# Altium PCB PCB1.PcbDoc (part 1 of 2)
Units mm, origin at the board's own origin, x right, y up, seen from the top; angles counter-clockwise.
Board outline 100.25 x 87.25 mm, 2 copper layers (Top Layer, Bottom Layer); 105 components, 70 nets, 373 pads, 474 vias.
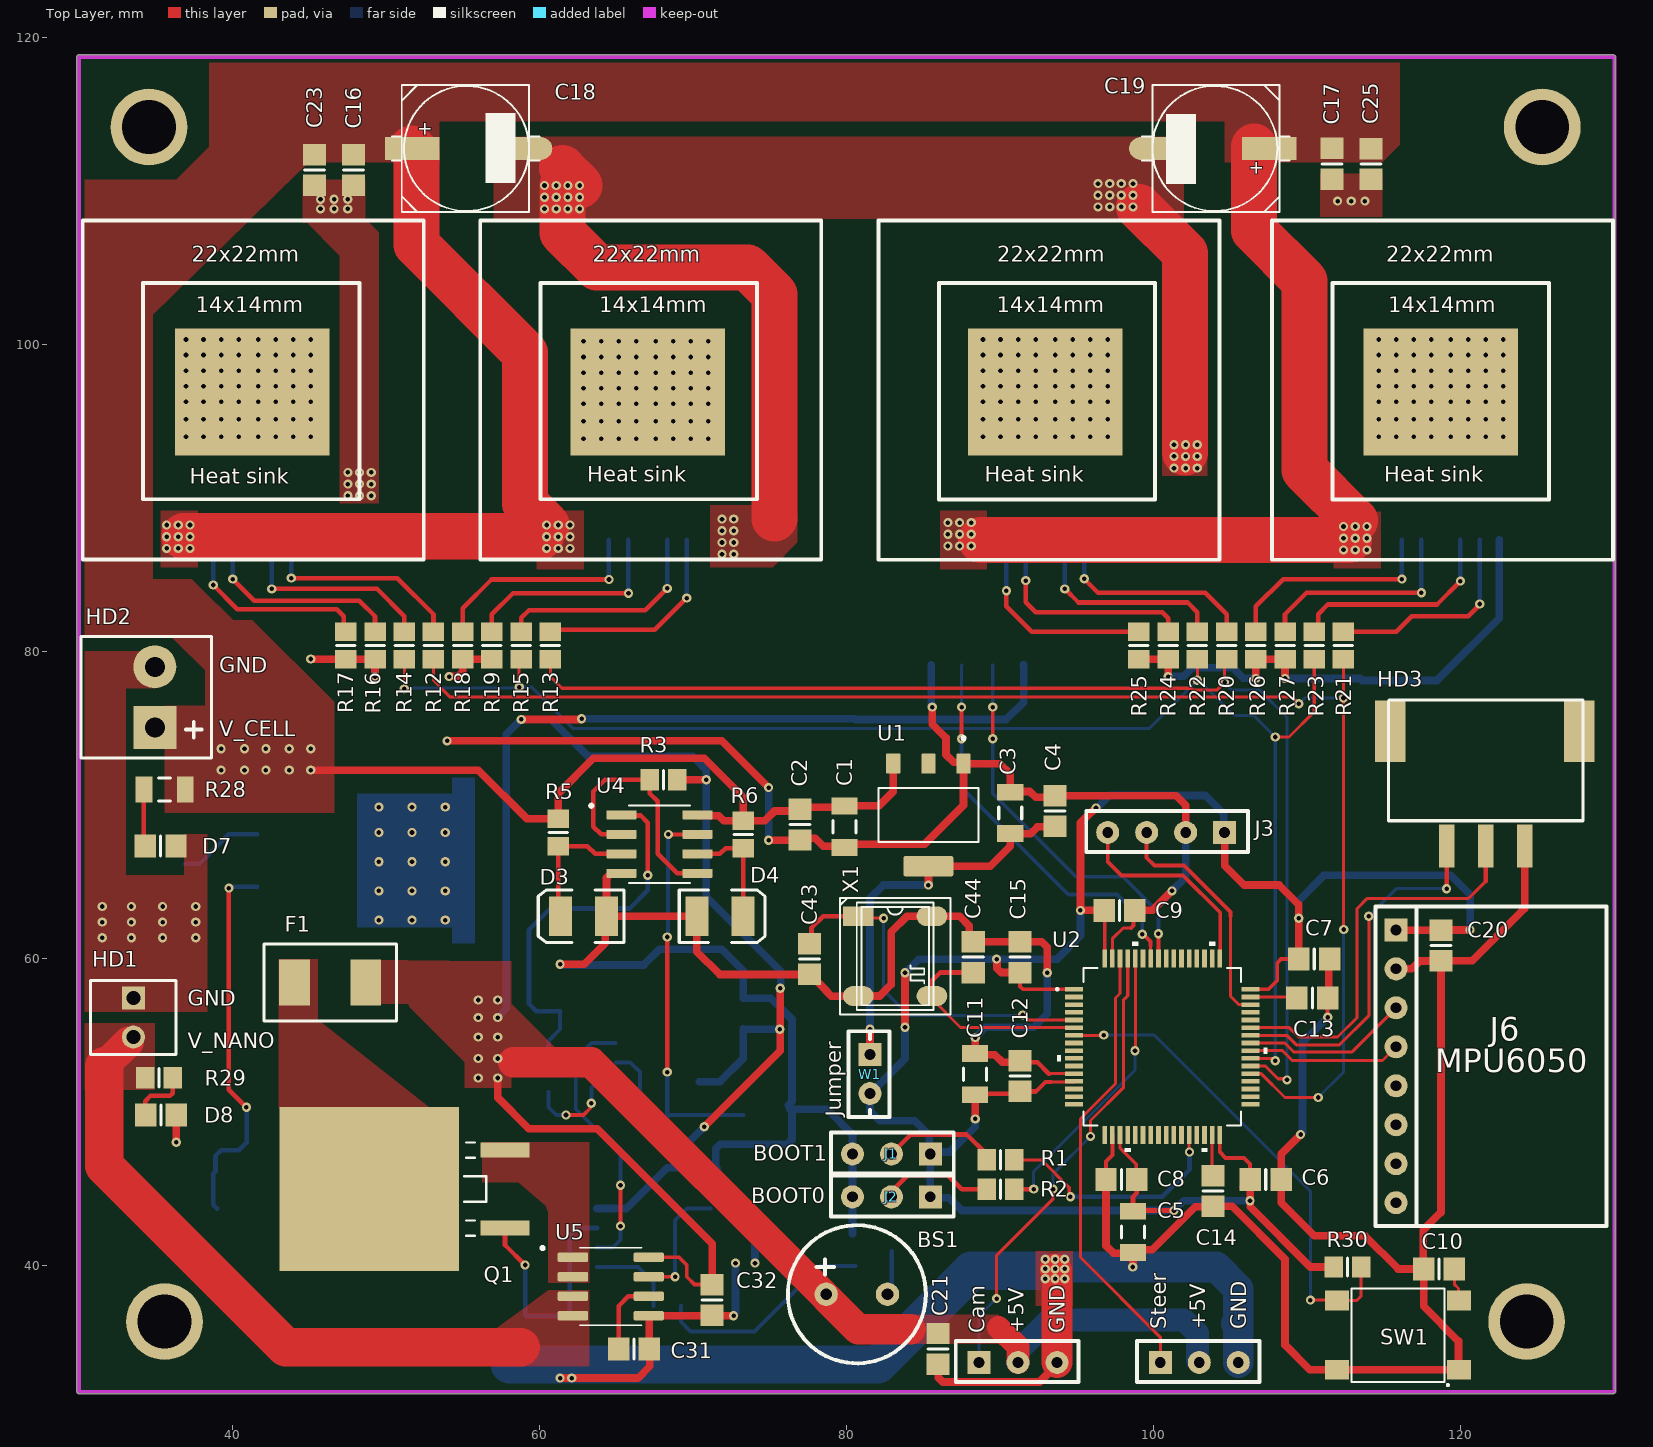
[diagram p0: Top Layer view]
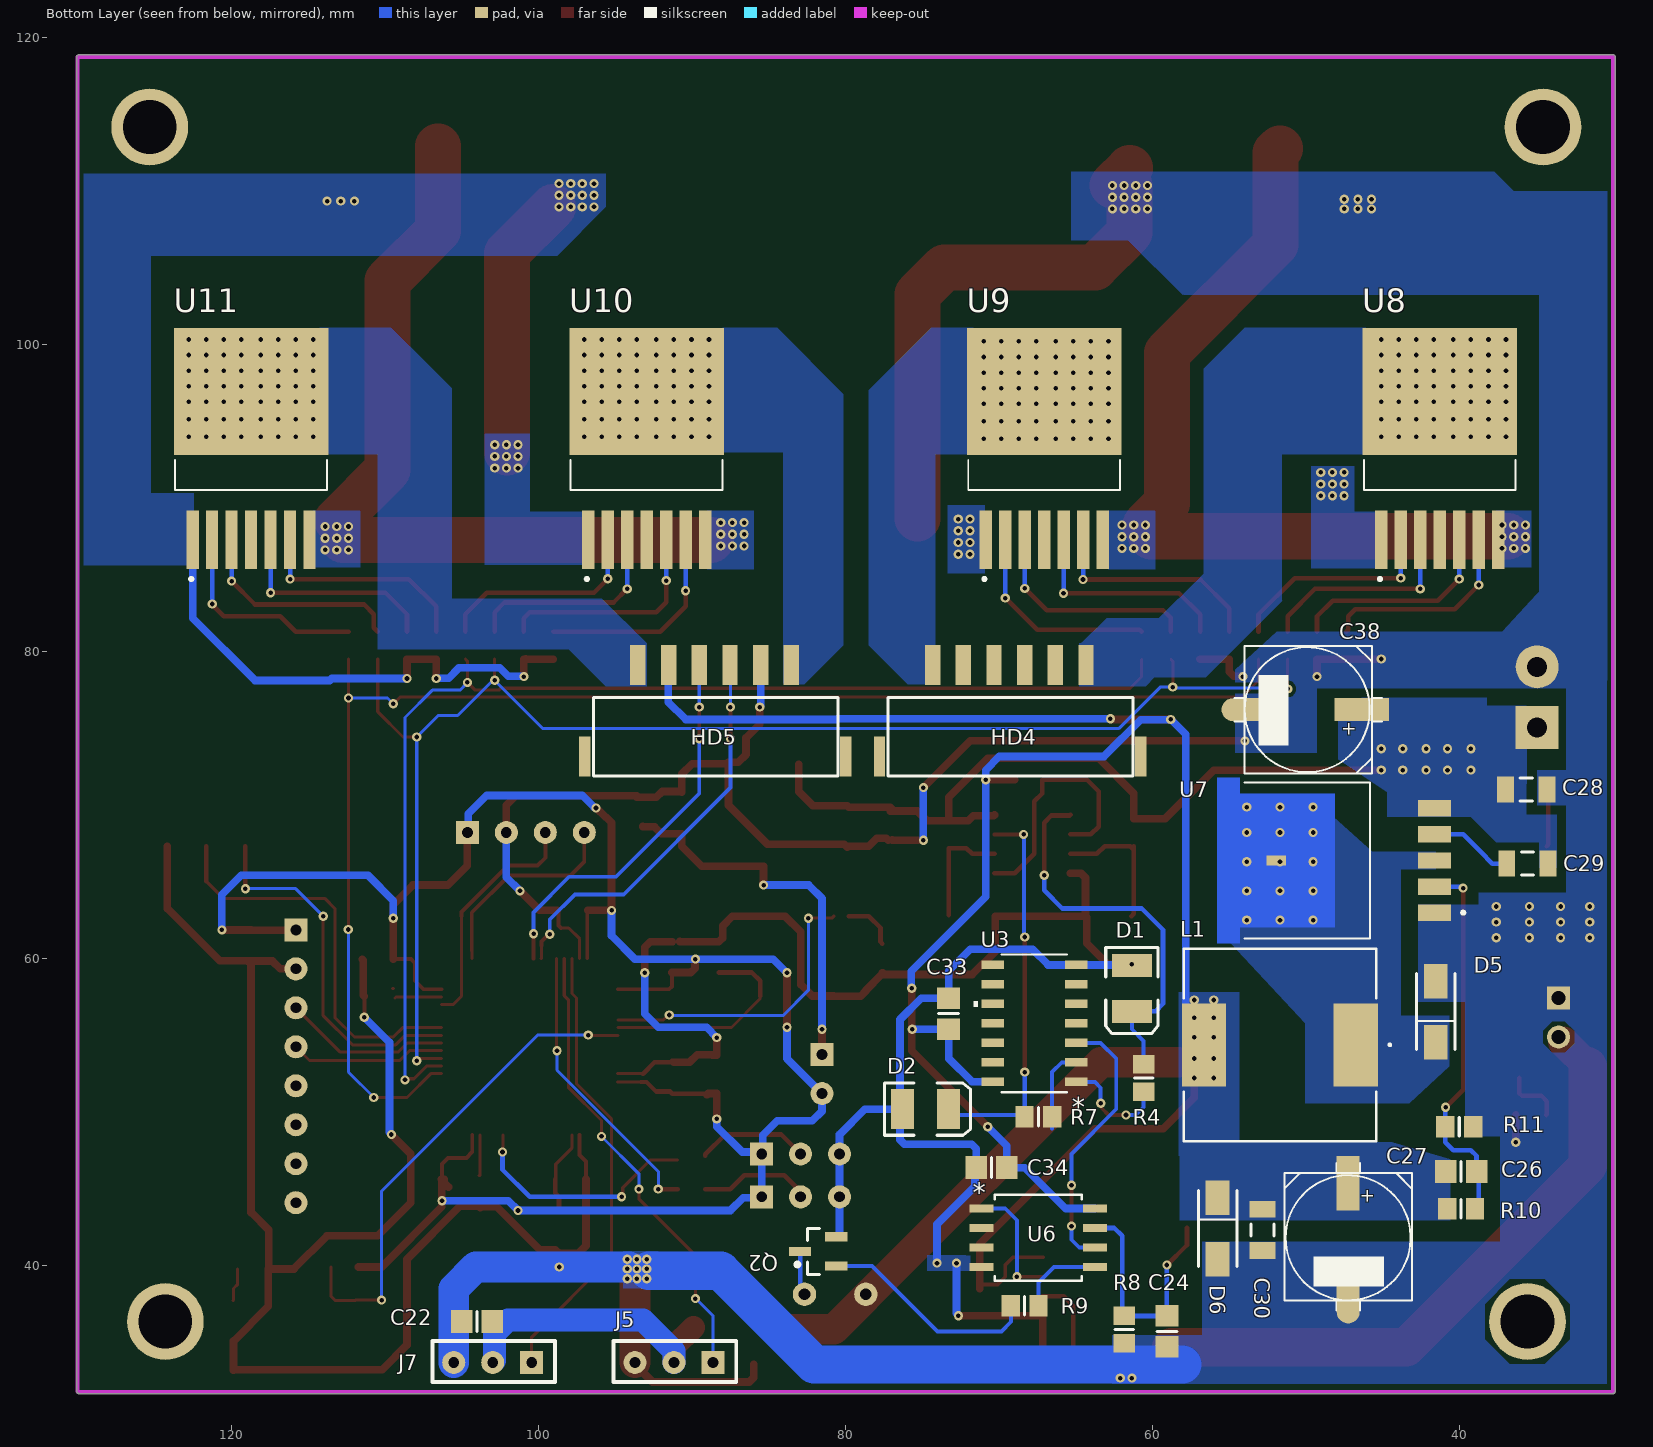
[diagram p1: Bottom Layer view, seen from below]

## Layer stack, top to bottom
Top Solder: solder mask 0.0102, Solder Resist, Dk 3.5
Top Layer: signal copper 0.0356
Dielectric 1: dielectric 0.32, FR-4, Dk 4.8
Bottom Layer: signal copper 0.0356
Bottom Solder: solder mask 0.0102, Solder Resist, Dk 3.5

## Board outline
29.972,31.623 cw(c29.972,31.75) 29.845,31.75 29.845,118.75 cw(c29.972,118.75) 29.972,118.877 129.972,118.877 cw(c129.972,118.75) 130.099,118.75 130.099,31.75 cw(c129.972,31.75) 129.972,31.623

## Design rules (kind name [scope] priority, off if disabled: settings)
Clearance [All] p1: gap=0.254 ignorepadtopadclearanceinfootprint=FALSE
PolygonConnect [All] p1: connectstyle=Direct reliefconductorwidth=0.254 reliefentries=4 polygonreliefangle="90 Angle" airgapwidth=0.254
RoutingVias [All] p1: holewidth=0.3 width=0.6 viastyle="Through Hole" minholewidth=0.3 minwidth=0.6 maxholewidth=0.3 maxwidth=0.6
SolderMaskExpansion [All] p1: expansion=0.102 istentingtop=FALSE
UnRoutedNet [All] p1: checkbadconnections=TRUE
Width GND [InNet('GND')] p1: maxlimit=2 minlimit=0.3 preferedwidth=0.5
Width Signal [InNetClass('Signal')] p2: maxlimit=0.3 minlimit=0.2 preferedwidth=0.3
Width V_CELL [InNetClass('V_CELL')] p3: maxlimit=2 minlimit=0.5 preferedwidth=1.5
Width VCC [InNetClass('VCC')] p4: maxlimit=0.5 minlimit=0.254 preferedwidth=0.3
29 further rules are at their usual default settings.

## Classes and differential pairs
component class Nano_Power_Detection: BS1 C24 C26 C27 C28 C29 C30 C31 C32 C33 C34 C38 D1 D2 D3 D4 D5 D6 D7 D8 F1 HD1 HD2 L1 Q1 Q2 R3 R4 R5 R6 R7 R8 R9 R10 R11 R28 R29 U3 U4 U5 U6 U7
component class Mainboard_2: C43 C44 HD3 HD4 HD5 J3 J5 J6 J7 R12 R13 R14 R15 R16 R17 R18 R19 R20 R21 R22 R23 R24 R25 R26 R27 U2 U8 U9 U10 U11 X1
component class Mainboard_1: C1 C2 C3 C4 C5 C6 C7 C8 C9 C10 C11 C12 C13 C14 C15 C16 C17 C18 C19 C20 C21 C22 C23 C25 J1 J2 R1 R2 R30 SW1 U1 W1

## Components (designator, comment, footprint, x,y, rotation, side; value= is the part's Value field where it differs from the comment)
BS1 "Buzzer" Buzzer 78.677,38.1 r0 top
C1 "10uF" C1206 79.883,68.58 r270 top
C2 "100nF" 6-0805_M 76.962,68.707 r270 top
C3 "10uF" C1206 90.678,69.469 r90 top
C4 "100nF" 6-0805_M 93.599,69.596 r90 top
C5 "Cap Pol1" C1206 98.679,42.164 r270 top value=4.7uF
C6 "100nF" 6-0805_M 107.331,45.593 r0 top
C7 "100nF" 6-0805_M 110.49,59.944 r0 top
C8 "100nF" 6-0805_M 97.917,45.593 r180 top
C9 "100nF" 6-0805_M 97.79,63.119 r0 top
C10 "100nF" 6-0805_M 118.618,39.751 r180 top
C11 "1uF" C1206 88.392,52.451 r90 top
C12 "100nF" 6-0805_M 91.313,52.324 r90 top
C13 "2.2uF" 6-0805_M 110.363,57.404 r0 top
C14 "2.2uF" 6-0805_M 103.886,44.831 r270 top
C15 "100nF" 6-0805_M 91.313,60.071 r90 top
C16 "100nF" 6-0805_M 47.879,111.379 r270 top
C17 "100nF" 6-0805_M 111.633,111.776 r270 top
C18 "330uF/25V" CAP-ALU-SMD-F 55.245,112.776 r0 top value=104
C19 "330uF/25V" CAP-ALU-SMD-F 104.013,112.776 r180 top value=104
C20 "100nF" 6-0805_M 118.745,60.833 r270 top
C21 "100nF" 6-0805_M 85.979,34.544 r270 top
C22 "100nF" 6-0805_M 104.013,36.322 r0 bottom
C23 "100nF" 6-0805_M 45.339,111.379 r270 top
C24 "10nF" 6-0805_M 59.055,35.687 r270 bottom
C25 "100nF" 6-0805_M 114.173,111.76 r270 top
C26 "33nF" 6-0805_M 39.878,46.101 r0 bottom
C27 "470uF" CAP-ALU-SMD-F 47.244,41.783 r270 bottom value=680uF
C28 "105" C1206 35.64,70.993 r0 bottom
C29 "105" C1206 35.56,66.167 r180 bottom
C30 "105" C1206 52.832,42.291 r90 bottom
C31 "1nF" 6-0805_M 66.151,34.544 r0 top
C32 "100nF" 6-0805_M 71.247,37.719 r270 top
C33 "100nF" 6-0805_M 73.279,56.388 r90 bottom
C34 "100nF" 6-0805_M 70.485,46.355 r0 bottom
C38 "470uF" CAP-ALU-SMD-F 49.911,76.2 r0 bottom value=680uF
C43 "22pF" 6-0805_M 77.597,59.944 r90 top
C44 "22pF" 6-0805_M 88.265,60.071 r90 top
D1 "Zener 5.1V" 3.5X2.8X1.9 61.341,58.039 r270 bottom
D2 "Zener 5.1V" 3.5X2.8X1.9 74.803,50.165 r180 bottom
D3 "Zener 5.1V" 3.5X2.8X1.9 62.865,62.738 r180 top
D4 "Zener 4.7V" 3.5X2.8X1.9 71.755,62.738 r0 top
D5 "SS54" DIOT_M5_025X220N 41.529,56.515 r90 bottom
D6 "TVS_5V" DIOT_M5_025X220N 55.753,42.386 r270 bottom
D7 "LED_R" 6-0805_M 35.306,67.31 r0 top
D8 "LED_R" 6-0805_M 35.322,49.784 r0 top
F1 "F/3A" "FUSE (6.1 x 2.69 x 2.69mm) - duplicate" 46.355,58.42 r180 top
HD1 "Header2" HDR2 33.528,57.404 r270 top
HD2 "2_pin connector" "2_PIN POWER 3.96" 34.925,75.034 r180 top
HD3 "3_pin conn" "3-pin XHB_2.54" 119.126,67.31 r90 top
HD4 "6-pin connnector (Encoder DC motor 2mm)" "6_PIN MOTOR" 64.326,79.121 r270 bottom
HD5 "6-pin connnector (Encoder DC motor 2mm)" "6_PIN MOTOR" 83.535,79.121 r270 bottom
J1 "3_pin connector" "3_PIN SERVO CONNECTOR" 82.931,47.244 r180 top
J2 "3_pin connector" "3_PIN SERVO CONNECTOR" 82.931,44.45 r180 top
J3 "4_pin connector" "4_PIN 2.54mm" 104.648,68.199 r180 top
J5 "3_pin steering wheel" "3_PIN SERVO CONNECTOR" 91.186,33.655 r0 bottom
J6 "8_pin IMU Connector" "8_PIN IMU CONNECTOR - duplicate" 115.824,59.309 r270 top
J7 "3_pin steering wheel" "3_PIN SERVO CONNECTOR" 102.997,33.655 r0 bottom
L1 "33uH/4.2A" IND_CDRH127/LDNP-470MC_SUM 51.689,54.356 r0 bottom
Q1 "IRFZ44" TO-263 49.797,44.958 r90 top value=IRF840
Q2 "SS8050" SOT23_M 81.788,40.894 r0 bottom
R1 "10K" 6-0805_N 90.043,46.863 r0 top
R2 "10K" 6-0805_N 90.043,44.958 r0 top
R3 "10k" 6-0805_N 68.072,71.628 r0 top value=10K
R4 "10K" 6-0805_N 60.579,52.197 r90 bottom value=1.5k
R5 "10K" 6-0805_N 61.214,68.199 r90 top
R6 "10K" 6-0805_N 73.279,68.072 r90 top
R7 "10K" 6-0805_N 67.437,49.657 r0 bottom
R8 "20K" 6-0805_N 61.849,35.814 r90 bottom value=15K
R9 "1k" 6-0805_N 68.326,37.338 r180 bottom value=10K
R10 "10K" 6-0805_N 39.878,43.688 r180 bottom value=1.5k
R11 "3.3K" 6-0805_N 40.005,49.022 r180 bottom value=1.5k
R12 "10K" 6-0805_N 53.086,80.391 r90 top
R13 "10K" 6-0805_N 60.706,80.38 r270 top
R14 "10K" 6-0805_N 51.181,80.391 r90 top
R15 "10K" 6-0805_N 58.801,80.391 r270 top
R16 "1K" 6-0805_N 49.276,80.38 r270 top value=10K
R17 "1K" 6-0805_N 47.371,80.38 r270 top value=10K
R18 "1K" 6-0805_N 54.991,80.391 r270 top value=10K
R19 "1K" 6-0805_N 56.896,80.391 r270 top value=10K
R20 "10K" 6-0805_N 104.775,80.391 r90 top
R21 "10K" 6-0805_N 112.395,80.391 r270 top
R22 "10K" 6-0805_N 102.87,80.391 r90 top
R23 "10K" 6-0805_N 110.49,80.391 r270 top
R24 "1K" 6-0805_N 100.965,80.38 r270 top value=10K
R25 "1K" 6-0805_N 99.06,80.38 r270 top value=10K
R26 "1K" 6-0805_N 106.68,80.391 r270 top value=10K
R27 "1K" 6-0805_N 108.585,80.391 r270 top value=10K
R28 "1.2K" C1206 35.56,70.993 r0 top value=10K
R29 "390" 6-0805_N 35.19,52.197 r180 top value=10K
R30 "10K" 6-0805_N 112.649,39.878 r180 top
SW1 "SW" SW2-SMD 115.951,35.433 r180 top value="Button chip 4 pin"
U1 "AMS1117" SOT229P700X180-4N 85.344,69.342 r270 top
U2 "STM32F405RGT6" LQFP64-10x10mm 100.584,54.229 r0 top
U3 "74HC08D" SO14_SOT108-1_NEX 67.691,55.753 r0 bottom
U4 "LM358DT" SOIC127P600X175-8N 67.818,67.437 r0 top
U5 "ACS712ELCTR-05B-T" SOIC127P600X175-8N 64.643,38.608 r0 top
U6 "ATTINY85-20SU" 8S2_ATM 67.437,41.783 r180 bottom
U7 "XL4015" CONV_XL4015 51.943,66.37 r0 bottom
U8 "BTS7960B" DPAK127P1490X440-8N 41.275,93.218 r90 bottom
U9 "BTS7960B" DPAK127P1490X440-8N 67.056,93.218 r90 bottom
U10 "BTS7960B" DPAK127P1490X440-8N 92.964,93.218 r90 bottom
U11 "BTS7960B" DPAK127P1490X440-8N 118.745,93.218 r90 bottom
W1 "Jumper" Jumper 81.534,53.721 r270 top
X1 "XT4" XT4-SMD 83.185,60.071 r270 top value=4Mhz

## Footprints (in the part's own frame and the unit in brackets; to place one, negate y for a bottom-side part, rotate by r counter-clockwise, add the part's x,y. Pads: shape width x height; smd on the part's side, far side on the other; paste and mask are expansions set on the pad)
"2_PIN POWER 3.96" [mm]
  rect 2.8x2.8 hole 1.3: 1(0,0)
  round 2.8 hole 1.3: 2(0,-3.96)
  silkscreen extent -3.68,-5.94 4.8,1.98
"3-pin XHB_2.54" [mm]
  rect 2.8x1 smd: 1(0,0) 2(0,-2.54) 3(0,-5.08)
  rect 4x2 smd: ""(7.493,-8.636) ""(7.493,3.683)
  silkscreen extent 1.65,-8.89 9.53,3.81
3.5X2.8X1.9 [mm] "SM LED; 2 C-Bend Leads; Body 3.5 x 2.8 x 1.9 mm, inc leads (LxWxH typ)"
  rect 1.5x2.6 smd: 1(-1.5,0) 2(1.5,0)
  silkscreen extent -2.65,-1.7 2.95,1.7
"3_PIN SERVO CONNECTOR" [mm]
  rect 1.5x1.5 hole 0.7: 1(-2.54,0)
  round 1.5 hole 0.7: 2(0,0) 3(2.54,0)
  silkscreen extent -4.06,-1.4 3.94,1.27
"4_PIN 2.54mm" [mm]
  rect 1.5x1.5 hole 0.7: 1(0,0)
  round 1.5 hole 0.7: 2(2.54,0) 3(5.08,0) 4(7.62,0)
  silkscreen extent -1.52,-1.4 9.02,1.27
6-0805_M [mm] "Chip Resistor, Body 2.0x1.2mm, IPC Low Density"
  rect 1.4x1.5 smd: 1(-1,0) 2(1,0)
  silkscreen extent 0,-0.65 0,0.65, body extent -1.07,-0.7 1.07,0.7, height 0.7
6-0805_N [mm] "Chip Resistor, Body 2.0x1.2mm, IPC Medium Density"
  rect 1.2x1.4 smd: 1(-0.9,0) 2(0.9,0)
  silkscreen extent 0,-0.6 0,0.6, body extent -1.07,-0.7 1.07,0.7, height 0.7
"6_PIN MOTOR" [mm]
  rect 2.6x1 smd: 1(0,0) 2(0,-2) 3(0,-4) 4(0,-6) 5(0,-8) 6(0,-10)
  rect 2.6x0.746 smd: ""(5.969,-13.462) ""(5.969,3.556)
  silkscreen extent 2.13,-12.91 7.24,3.05
"8_PIN IMU CONNECTOR - duplicate" [mm]
  rect 1.5x1.5 hole 0.7: 1(-2.54,0)
  round 1.5 hole 0.7: 2(0,0) 3(2.54,0) 4(5.08,0) 5(7.62,0) 6(10.16,0) 7(12.7,0) 8(15.24,0)
  silkscreen extent -4.06,-1.33 16.76,1.33
8S2_ATM [mil]
  rect 62x21 smd paste+0 mask+0: 1(-145.5,75) 2(-145.5,25) 3(-145.5,-25) 4(-145.5,-75) 5(145.5,-75) 6(145.5,-25) 7(145.5,25) 8(145.5,75)
  silkscreen extent -112,-111 112,111, body extent -163,-106 163,106, height 85
Buzzer [mil]
  round 60 hole 30: 1(0,0) 2(157.48,0)
  silkscreen extent -98,-177 256,177
C1206 [mm] "Chip Capacitor, Body 3.2x1.6mm, IPC High Density"
  rect 1.1x1.7 smd: 1(-1.35,0) 2(1.35,0)
  silkscreen extent -0.4,-0.75 0.4,0.75, body extent -1.7,-0.9 1.7,0.9, height 1.3
CAP-ALU-SMD-F [mil]
  rect 140x59.06 smd: 1(-140,0)
  oval 140x59.06 smd: 2(150,0)
  silkscreen extent -192,-163 187,163, body extent -195,-163 195,163, height 402
CONV_XL4015 [mm]
  rect 2.16x1.07 smd: 1(-10.335,3.4) 2(-10.335,1.7) 3(-10.335,0) 4(-10.335,-1.7) 5(-10.335,-3.4)
  rect 1.27x0.635 smd paste-2 mask+0: 3.1(0,0)
  Top Layer region: 3.835,-5.4 2.365,-5.4 2.365,-4.35 -3.835,-4.35 -3.835,4.35 2.365,4.35 2.365,5.4 3.835,5.4
  silkscreen extent -12.3,-5.08 2.05,5.08, body extent -7.17,-5.08 7.18,5.08, height 4.7
DIOT_M5_025X220N [mm]
  rect 2.25x1.55 smd: 1(-2,0) 2(2,0)
  silkscreen extent -2.47,-1.25 2.47,1.25, body extent -2.47,-1.25 2.48,1.25, height 2.2
DPAK127P1490X440-8N [mm]
  rect 3.81x0.8 smd: 1(-5.95,3.81) 2(-5.95,2.54) 3(-5.95,1.27) 4(-5.95,0) 5(-5.95,-1.27) 6(-5.95,-2.54) 7(-5.95,-3.81)
  rect 8.29x10.07 smd paste-6: 8(3.71,0)
  silkscreen extent -8.6,-4.95 -0.75,4.95, body extent -7.45,-4.95 7.45,4.95, height 4.4
"FUSE (6.1 x 2.69 x 2.69mm) - duplicate" [mm]
  rect 2x3 smd: 1(-2.325,0) 2(2.325,0)
  silkscreen extent -4.33,-2.5 4.33,2.5
HDR2 [mm] "Connector; Header; 2 Position"
  rect 1.5x1.5 hole 0.9: 1(0,0)
  round 1.5 hole 0.9: 2(2.54,0)
  silkscreen extent -1.14,-2.79 3.68,2.77, body extent -1.27,-2.92 3.81,2.88, height 11.72
IND_CDRH127/LDNP-470MC_SUM [mil]
  rect 114x213 smd: 1(-195,0) 2(195,0)
  silkscreen extent -285,-247 247,247, body extent -236,-236 236,236, height 315
Jumper [mm]
  rect 1.5x1.5 hole 0.7: 1(0,0)
  round 1.5 hole 0.7: 2(2.54,0)
  silkscreen extent -1.52,-1.4 4.06,1.27
LQFP64-10x10mm [mm]
  rect 1.194x0.305 smd paste+0 mask+0: 1(-5.75,3.75) 2(-5.75,3.25) 3(-5.75,2.75) 4(-5.75,2.25) 5(-5.75,1.75) 6(-5.75,1.25) 7(-5.75,0.75) 8(-5.75,0.25) 9(-5.75,-0.25) 10(-5.75,-0.75) 11(-5.75,-1.25) 12(-5.75,-1.75) 13(-5.75,-2.25) 14(-5.75,-2.75) 15(-5.75,-3.25) 16(-5.75,-3.75) 33(5.75,-3.75) 34(5.75,-3.25) 35(5.75,-2.75) 36(5.75,-2.25) 37(5.75,-1.75) 38(5.75,-1.25) 39(5.75,-0.75) 40(5.75,-0.25) 41(5.75,0.25) 42(5.75,0.75) 43(5.75,1.25) 44(5.75,1.75) 45(5.75,2.25) 46(5.75,2.75) 47(5.75,3.25) 48(5.75,3.75)
  rect 0.305x1.194 smd paste+0 mask+0: 17(-3.75,-5.75) 18(-3.25,-5.75) 19(-2.75,-5.75) 20(-2.25,-5.75) 21(-1.75,-5.75) 22(-1.25,-5.75) 23(-0.75,-5.75) 24(-0.25,-5.75) 25(0.25,-5.75) 26(0.75,-5.75) 27(1.25,-5.75) 28(1.75,-5.75) 29(2.25,-5.75) 30(2.75,-5.75) 31(3.25,-5.75) 32(3.75,-5.75) 49(3.75,5.75) 50(3.25,5.75) 51(2.75,5.75) 52(2.25,5.75) 53(1.75,5.75) 54(1.25,5.75) 55(0.75,5.75) 56(0.25,5.75) 57(-0.25,5.75) 58(-0.75,5.75) 59(-1.25,5.75) 60(-1.75,5.75) 61(-2.25,5.75) 62(-2.75,5.75) 63(-3.25,5.75) 64(-3.75,5.75)
  silkscreen extent -6.93,-6.85 6.85,6.85, body extent -6,-6 6,6, height 1.6
SO14_SOT108-1_NEX [mil]
  rect 57.5x22 smd paste+0 mask+0: 1(-107.25,150) 2(-107.25,100) 3(-107.25,50) 4(-107.25,0) 5(-107.25,-50) 6(-107.25,-100) 7(-107.25,-150) 8(107.25,-150) 9(107.25,-100) 10(107.25,-50) 11(107.25,0) 12(107.25,50) 13(107.25,100) 14(107.25,150)
  silkscreen extent -84,-177 156,177, body extent -122,-172 122,172, height 69
SOIC127P600X175-8N [mm]
  rrect25% 1.97x0.6 smd: 1(-2.475,1.905) 2(-2.475,0.635) 3(-2.475,-0.635) 4(-2.475,-1.905) 5(2.475,-1.905) 6(2.475,-0.635) 7(2.475,0.635) 8(2.475,1.905)
  silkscreen extent -4.54,-2.52 2,2.6, body extent -3,-2.45 3,2.45, height 1.75
SOT23_M [mm] "SOT23, 3-Leads, Body 2.9x1.3mm, Pitch 0.95mm, Lead Span 2.3mm - Reverse Pinning, IPC Low Density"
  rect 1.45x0.6 smd: 1(1.175,0) 2(-1.175,-0.95) 3(-1.175,0.95)
  silkscreen extent -0.1,-1.5 1.48,1.5, body extent -0.7,-1.5 0.7,1.5, height 1.1
SOT229P700X180-4N [mm]
  rrect15% 1.31x0.93 smd: 1(-3.345,2.29) 2(-3.345,0) 3(-3.345,-2.29)
  rrect15% 1.31x3.24 smd: 4(3.345,0)
  silkscreen extent -5.1,-3.25 1.75,3.25, body extent -3.75,-3.25 3.24,3.25, height 1.8
SW2-SMD [mm] "6*6mm vertical type, SMD, height 5.0mm, black actuator, 160gf, T&R"
  rect 1.55x1.3 smd: 1(-3.975,2.25) 2(-3.975,-2.25) 3(3.975,-2.25) 4(3.975,2.25)
  silkscreen extent -3.29,-3.04 3.04,3.29, body extent -4.5,-3.1 4.5,3.1, height 4.99
TO-263 [mil]
  rect 39x126 smd paste+0 mask+0: 1(-100,-313) 3(100,-313)
  rect 420x461 smd paste+0 mask+0: 2(0,35.5)
  silkscreen extent -119,-265 120,-208
XT4-SMD [mm]
  rect 1.3x2 smd: 1(-2.667,-2.413)
  oval 1.3x2 smd: 2(2.533,-2.413) 3(2.533,2.387) 4(-2.667,2.387)
  silkscreen extent -3.87,-3.61 3.73,3.59, body extent -3.58,-2.5 3.43,2.48, height 2.03

## Part data
C1 C2 C3 C4 C6 C7 C8 C9 C10 C12 C13 C14 C15 C16 C17 C20 C21 C22 C23 C24 C25 C26 C28 C29 C30 C31 C32 C33 C34 C43 C44: library part Cap, "Capacitor", LatestRevisionDate=17-Jul-2002, LatestRevisionNote="Re-released for DXP Platform.", PackageDescription="Radial Cap, Thru-Hole; 2 Leads; 0.3 in Pin Spacing", PackageReference=RAD-0.3, Published=8-Jun-2000, Publisher="Altium Limited"
C5: "Polarized Capacitor (Radial)", LatestRevisionDate=17-Jul-2002, LatestRevisionNote="Re-released for DXP Platform.", PackageDescription="Polarized Capacitor (Radial); 2 Leads", PackageReference=RB7.6-15, Published=8-Jun-2000, Publisher="Altium Limited"
C11: library part "Cap Pol1", "Polarized Capacitor (Radial)", LatestRevisionDate=17-Jul-2002, LatestRevisionNote="Re-released for DXP Platform.", PackageDescription="Polarized Capacitor (Radial); 2 Leads", PackageReference=RB7.6-15, Published=8-Jun-2000, Publisher="Altium Limited"
C18 C19: library part CN-ALU-DIP, "Capacitor (Semiconductor SIM Model)", LatestRevisionDate=17-Jul-2002, LatestRevisionNote="Re-released for DXP Platform.", PackageReference=C1206, Publisher="Altium Limited"
C27 C38: library part "Cap Pol3", "Polarized Capacitor (Surface Mount)", LatestRevisionDate=29-May-2009, LatestRevisionNote="IPC-7351 Footprint Added.", PackageDescription="Chip Capacitor", PackageReference=C0805, Published=8-Jun-2000, Publisher="Altium Limited"
D1 D2 D3 D4: library part "D Zener", "Zener Diode", LatestRevisionDate=17-Jul-2002, LatestRevisionNote="Re-released for DXP Platform.", PackageDescription="Diode, Thru-Hole; 2 Leads; 0.7 in Pin Spacing", PackageReference=DIODE-0.7, Published=8-Jun-2000, Publisher="Altium Limited"
D5: library part SS54-HF, "Diode Schottky 40 V 5A Surface Mount DO-214AC (SMA)", Package="DO-214AC-214 Comchip Technology", Check_prices=https://www.snapeda.com/parts/SS54-HF/Comchip/view-part/?ref=eda, MF="Comchip Technology", MP=SS54-HF, SnapEDA_Link=https://www.snapeda.com/parts/SS54-HF/Comchip/view-part/?ref=snap
D7 D8: library part LED1, "Typical RED GaAs LED", LatestRevisionDate=08-Jul-2005, LatestRevisionNote="Mech Layer 1 removed.", PackageDescription="LED; 2 Leads", PackageReference=LED-1, Published=8-Jun-2000, Publisher="Altium Limited"
F1: library part Fuse
HD1: "Header IDC, 2 x 1 Pin Vertical 2.54mm Pitch (Non-Boxed, Male)", Manufacturer="W¨¹rth Elektronik eiSos GmbH", partNo=613002143121, ComponentLink1 Description=Manufacturer, ComponentLink1URL=http://www.we-online.com, ComponentLink2 Description=Datasheet, ComponentLink2URL=http://katalog.we-online.de/em/datasheet/6130xx143121.pdf, Created by="Karrer Zheng", Created Date="29 March 2013", NoPins=02
HD4 HD5: library part "6-pin connnector (Encoder DC motor 2.54mm)"
J1 J2: "Boot using for stm32"
L1: library part Inductor, "Inductor", Code_IEC=1005, Code_JEITA=0402, LatestRevisionDate=29-May-2009, LatestRevisionNote="IPC-7351 Footprint Added.", PackageDescription="Chip Inductor", PackageReference=0402-A, Published=8-Jun-2000, Publisher="Altium Limited"
Q2: "NPN General Purpose Amplifier", ComponentLink1Description="Manufacturer Link", ComponentLink1URL=http://www.fairchildsemi.com/, ComponentLink2Description=Datasheet, ComponentLink2URL=http://www.fairchildsemi.com/ds/2N%2F2N3904.pdf, DatasheetVersion=1997, LatestRevisionDate=15-Jan-2003, LatestRevisionNote="PCB Footprint 'BCY-W3/D4.7' replaced", PackageDescription="TO, Flat Index; 3 In-Line, Axial Leads; Body Dia. 4.5mm; Leads 0.51 x 0.48 mm (max)", PackageReference=TO-92A, PackageVersion=Sep-1998, Published=8-Jun-2000, Publisher="Altium Limited"
R1 R2 R3 R4 R5 R6 R7 R8 R9 R10 R11 R12 R13 R14 R15 R16 R17 R18 R19 R20 R21 R22 R23 R24 R25 R26 R27 R28 R29 R30: library part Res1, "Resistor", LatestRevisionDate=17-Jul-2002, LatestRevisionNote="Re-released for DXP Platform.", PackageDescription="Axial Device, Thru-Hole; 2 Leads; 0.3 in Pin Spacing", PackageReference=AXIAL-0.3, Published=8-Jun-2000, Publisher="Altium Limited"
SW1: library part SW4, "Switch button 4 pin"
U1: "1A LOW DROPOUT VOLTAGE REGULATOR SOT-223", Package="SOT-223 Seeed Technology", Check_prices=https://www.snapeda.com/parts/AMS1117/Advanced+Monolithic+Systems/view-part/?ref=eda, MF="Advanced Monolithic Systems", MP=AMS1117, SnapEDA_Link=https://www.snapeda.com/parts/AMS1117/Advanced+Monolithic+Systems/view-part/?ref=snap
U2: "High-performance foundation line, Arm Cortex-M4 core with DSP and FPU, 1 Mbyte of Flash memory, 168 MHz CPU, ART Accelerator", Manufacturer_Name=STMicroelectronics, Copyright="Copyright (C) 2025 Ultra Librarian. All rights reserved.", Datasheet=https://www.st.com/resource/en/datasheet/stm32f405rg.pdf, Manufacturer_Part_Number=STM32F405RGT6, RefDes=RefDes, Type=Type
U5: "Current Sensor 5A 1 Channel Hall Effect, Open Loop Bidirectional 8-SOIC (0.154, 3.90mm Width)", Package="SOIC-8 Allegro MicroSystems LLC", Check_prices=https://www.snapeda.com/parts/ACS712ELCTR-05B-T/Allegro/view-part/?ref=eda, MF=Allegro, MP=ACS712ELCTR-05B-T, SnapEDA_Link=https://www.snapeda.com/parts/ACS712ELCTR-05B-T/Allegro/view-part/?ref=snap
U7: "5A 180KHz 36V Buck DC to DC Converter", Package=None, Check_prices=https://www.snapeda.com/parts/XL4015/XLSEMI/view-part/?ref=eda, MF=XLSEMI, MP=XL4015, SnapEDA_Link=https://www.snapeda.com/parts/XL4015/XLSEMI/view-part/?ref=snap
U8 U9 U10 U11: "Half Bridge Driver DC Motors, General Purpose DMOS PG-TO263-7-1", Package="TO-263 Infineon", Check_prices=https://www.snapeda.com/parts/BTS7960B/Infineon/view-part/?ref=eda, MF=Infineon, MP=BTS7960B, SnapEDA_Link=https://www.snapeda.com/parts/BTS7960B/Infineon/view-part/?ref=snap
X1: "Crystal, 16 MHz, -30 to 85 degC, 3.2 x 2.5 x 0.9 mm SMD"

## Free pads (board coordinates)
  rect 10.07x8.29 smd paste-6: 2(41.275,96.901) 2(67.056,96.901) 2(92.964,96.901) 2(118.745,96.901)
  round 5 hole 3.5: ""(34.544,114.173) ""(35.56,36.322) ""(124.333,36.322) ""(125.349,114.173)

## Via types
v1: diameter 0.6, hole 0.3, Top Layer to Bottom Layer, 474 vias

## Nets (pads, with @x,y where several pads share a name; then routed paths per layer and width w, separated by ;. In a path a pad name is that pad's centre, name@x,y a point inside that pad or via, vN(x,y) a via of type N, cw(c..) or ccw(c..) an arc to the next point about the centre after c; other vN are vias at no path point)
+3V3: C5.1 C6.1 C7.1 C8.1 C9.1 C11.1 C12.1 C15.1 C20.1 J1.1 J2.1 J3.1 J6.1 R30.2 U2.1 U2.13 U2.19 U2.32 U2.48 U2.64 W1.2 | length 154
  Top Layer w0.2: 93.345,51.943 U2.13@94.869,51.943 ; U2.64@96.834,59.979 96.834,62.227 ; 97.834,47.625 U2.19@97.834,48.479 ; 97.842,47.625 98.892,46.575
  Top Layer w0.254: C15.1@91.313,58.928 91.313,58.166 91.5,57.979 U2.1@94.834,57.979 ; 92.351,51.318 92.975,51.943 93.345,51.943 ; C9.1@96.79,63.119 96.834,63.075 96.834,62.227 ; 98.892,46.575 98.892,45.618 C8.1@98.917,45.593 ; U2.32@104.334,48.479 104.334,47.371 104.715,46.99 105.918,46.99 106.308,46.6 106.308,45.729 C6.1@106.172,45.593 ; U2.48@106.334,57.979 107.509,57.979 108.077,58.547 108.077,59.69 108.331,59.944 C7.1@109.22,59.944
  Top Layer w0.3: C11.1@89.027,51.101 89.107,51.181 91.297,51.181 91.434,51.318 92.351,51.318 ; C8.1@98.917,45.593 98.933,45.577 98.933,44.704 98.679,44.45 C5.1@98.679,43.514 98.726,43.561 v1(101.346,43.561)
  Top Layer w0.5: v1(83.82,55.499) v1(83.82,59.055) ; v1(88.392,49.53) C11.1@88.392,51.101 ; C11.1@88.392,51.181 88.947,51.181 C11.1@89.027,51.101 ; v1(89.789,59.944) 89.808,59.925 89.808,59.345 90.082,59.071 C15.1@91.313,59.071 ; v1(96.266,69.792) 96.239,69.792 95.626,69.18 95.604,69.18 95.25,68.826 v1(95.25,63.119) C9.1@96.79,63.119 ; J3.1@104.648,68.199 104.648,66.04 105.918,64.77 108.204,64.77 109.474,63.5 v1(109.474,62.611) ; C6.1@105.881,45.093 106.157,45.37 C6.1@106.157,45.593 ; C6.1@106.331,45.593 106.315,45.577 106.315,45.37 106.315,44.212 v1(106.299,44.196) 106.318,44.177 106.318,43.796 110.236,39.878 R30.2@111.749,39.878 ; v1@109.482,62.603 109.482,59.952 C7.1@109.49,59.944 ; J6.1@115.824,61.849 115.84,61.833 118.729,61.833 C20.1@118.745,61.849 ; C20.1@118.745,61.833 118.753,61.841 120.642,61.841 v1(120.65,61.849)
  Bottom Layer w0.5: v1(83.82,55.499) 83.82,53.467 W1.2@81.534,51.181 81.534,50.038 82.169,49.403 84.455,49.403 85.407,48.451 85.407,47.308 J1.1@85.471,47.244 ; v1(83.82,59.055) 84.709,59.944 v1(89.789,59.944) 93.726,59.944 95.25,61.468 v1(95.25,63.119) ; v1(88.392,49.53) 88.392,49.022 86.741,47.371 85.598,47.371 J1.1@85.471,47.244 ; v1@96.393,69.85 97.155,70.612 103.378,70.612 104.584,69.406 104.584,68.263 J3.1@104.648,68.199 ; v1(106.299,44.196) 101.981,44.196 v1(101.346,43.561) 87.503,43.561 86.678,44.386 85.535,44.386 J2.1@85.471,44.45 J1.1@85.471,47.244 ; v1(109.474,62.611) 109.474,63.754 111.125,65.405 119.38,65.405 120.65,64.135 v1@120.65,61.976
+5: BS1.1 C21.1 C22.1 C26.2 C27.1 C30.2 C32.1 C33.1 C34.1 D6.1 F1.1 HD5.5 J5.2 J7.2 L1.2 R3.2 R10.1 U3.14 U5.8 U6.8 | length 194.8
  Top Layer w0.254: U5.8@67.118,40.513 69.088,40.513 69.596,40.005 69.596,39.243 70.104,38.735 C32.1@71.247,38.735
  Top Layer w0.5: v1(57.277,52.197) 57.277,50.927 59.309,48.895 63.754,48.895 71.247,41.402 71.247,38.735 C32.1@71.247,38.719 C32.1@71.247,38.481 ; v1(58.801,75.565) 62.661,75.565 62.711,75.615 v1(62.738,75.615) ; R3.2@68.972,71.628 v1(70.866,71.628) ; v1(70.739,49.022) 75.692,53.975 v1@75.692,55.245 ; v1@75.692,55.372 75.669,55.395 75.669,55.418 75.692,55.441 v1(75.692,58.039)
  Top Layer w1.5: 89.904,35.949 91.186,34.667 J5.2@91.186,33.655
  Top Layer w2: 58.293,53.213 63.373,53.213 BS1.1@78.486,38.1 ; BS1.1@78.677,37.909 80.772,35.814 84.201,35.814
  Bottom Layer w0.5: v1(57.277,56.134) 57.84,56.697 57.84,74.604 v1(58.801,75.565) 58.82,75.546 60.762,75.546 63.156,73.152 69.977,73.152 70.866,72.263 v1(70.866,71.628) 70.866,64.008 75.711,59.163 75.711,58.058 v1(75.692,58.039) ; v1(62.738,75.615) 80.544,75.615 80.594,75.565 90.424,75.565 91.551,76.692 91.551,79.105 HD5.5@91.535,79.121 ; U6.8@63.741,43.688 65.659,43.688 68.326,46.355 C34.1@69.469,46.355 ; C34.1@69.485,46.355 69.485,47.768 v1(70.739,49.022) ; U3.14@70.415,51.943 71.755,51.943 73.279,53.467 C33.1@73.279,55.372 ; C33.1@73.279,55.388 73.287,55.38 75.642,55.38 v1(75.65,55.372) ; J7.2@102.87,33.782 J7.2@102.997,33.655
  Bottom Layer w1.5: J5.2@91.186,33.655 91.186,34.417 93.208,36.439 101.991,36.439 102.87,35.56 J7.2@102.87,33.782
  other v1: 56.007,52.197 56.007,53.467 57.277,53.467 56.007,54.864 57.277,54.864 56.007,56.134 56.007,57.277 57.277,57.277
BOOT0: R2.2 U2.60 | length 19.1
  Top Layer w0.2: v1(98.806,53.975) 98.834,54.003 U2.60@98.834,59.979
  Top Layer w0.3: R2.2@90.943,44.958 v1(92.202,44.958)
  Bottom Layer w0.2: v1(92.202,44.958) 92.202,46.101 98.806,52.705 v1@98.806,54.01
BOOT1: R1.2 U2.28 | length 15.7
  Top Layer w0.2: R1.2@90.943,46.863 92.71,46.863 94.523,45.05 94.523,44.523 v1(94.596,44.45) ; U2.28@102.334,48.479 102.334,47.399 v1(102.359,47.374)
  Bottom Layer w0.3: v1(94.596,44.45) 100.584,44.45 102.359,46.225 v1(102.359,47.374)
Camera: J5.1 U2.61 | length 30.4
  Top Layer w0.2: v1(89.789,37.82) 89.789,40.64 93.472,44.323 v1(93.472,44.958) ; v1(95.904,48.387) 95.904,49.422 98.044,51.562 98.044,57.27 98.334,57.56 98.334,58.466 U2.61@98.334,59.979
  Bottom Layer w0.2: J5.1@88.646,33.655 88.646,36.703 89.763,37.82 v1(89.789,37.82) ; v1(93.472,44.958) 93.472,45.955 v1(95.904,48.387)
Current_SIG: U5.7 U6.1 | length 8
  Top Layer w0.254: U5.7@67.118,39.243 v1(68.834,39.243)
  Bottom Layer w0.254: v1(68.834,39.243) 68.834,42.926 69.596,43.688 U6.1@71.133,43.688
EN: R14.1 R15.2 R22.1 R23.2 U2.39 | length 95.3
  Top Layer w0.2: v1(51.181,77.555) 51.194,77.568 51.194,79.478 R14.1@51.181,79.491 ; v1(58.674,77.67) 58.674,79.364 R15.2@58.801,79.491 ; v1(102.87,78.124) R22.1@102.87,79.491 ; U2.39@106.334,53.479 107.703,53.479 107.857,53.325 v1(107.95,53.325) ; v1(107.95,74.422) 108.839,74.422 110.49,76.073 R23.2@110.49,79.491
  Bottom Layer w0.2: v1(51.181,77.555) 51.238,77.612 58.616,77.612 v1(58.674,77.67) ; v1@58.747,77.67 59.492,77.67 62.201,74.961 99.718,74.961 102.783,78.026 v1@102.87,78.026 ; v1(102.87,78.124) 102.978,78.124 105.283,75.819 106.553,75.819 v1(107.95,74.422) v1(107.95,53.325)
Encode_A: HD5.3 U2.58 | length 26.2
  Top Layer w0.2: 99.822,60.833 99.822,59.991 U2.58@99.834,59.979
  Top Layer w0.254: v1(87.503,74.307) v1(87.503,76.369) ; v1(99.277,61.558) 99.351,61.558 99.822,61.087 99.822,60.833
  Bottom Layer w0.2: v1(87.503,76.369) 87.503,79.089 HD5.3@87.535,79.121
  Bottom Layer w0.254: v1(87.503,74.307) 87.503,71.12 94.46,64.163 97.635,64.163 99.277,62.521 v1(99.277,61.558)
Encode_B: HD5.4 U2.57 | length 25.4
  Top Layer w0.254: v1(89.535,74.307) v1(89.535,76.369) ; v1(100.33,61.595) 100.334,61.591 U2.57@100.334,59.979
  Bottom Layer w0.2: v1(89.535,76.369) HD5.4@89.535,79.121
  Bottom Layer w0.254: v1(89.535,74.307) 89.535,70.739 94.964,65.31 98.012,65.31 100.33,62.992 v1(100.33,61.595)
FORWARD: R12.1 R21.2 U2.37 | length 95.8
  Top Layer w0.2: R12.1@53.086,79.491 53.086,78.105 54.175,77.016 85.32,77.016 85.327,77.023 102.404,77.023 102.411,77.016 109.039,77.016 v1(109.474,76.581) ; U2.37@106.334,52.479 107.033,52.479 108.585,50.927 v1(110.744,50.927) ; R21.2@112.395,79.491 v1(112.395,76.962) 112.395,61.887 v1(112.409,61.873)
  Bottom Layer w0.2: v1(109.474,76.581) 109.855,76.962 v1(112.395,76.962) ; v1@110.77,50.953 112.395,52.578 112.395,61.858 v1(112.409,61.873)
GND: C1.2 C2.2 C3.2 C4.2 C5.2 C6.2 C7.2 C8.2 C9.2 C10.2 C11.2 C12.2 C13.2 C14.2 C15.2 C16.2 C17.2 C18.2 C19.2 C20.2 C21.2 C22.2 C23.2 C24.2 C25.2 C27.2 C28.1 C30.1 C31.2 C32.2 C33.2 C34.2 C38.2 C43.1 C44.2 D1.1 D2.1 D3.1 D4.1 D5.2 D6.2 D7.2 D8.2 HD1.1 HD2.2 HD3.3 HD5.2 J1.3 J2.3 J3.2 J5.3 J6.2 J7.3 Q2.2 R8.1 R11.2 R16.2 R17.2 R18.2 R19.2 R24.2 R25.2 R26.2 R27.2 SW1.1 SW1.4 U1.1 U2.12 U2.18 U2.63 U3.7 U4.4 U5.5 U6.4 U7.1 U8.1 U9.1 U10.1 U11.1 X1.2 X1.4 | length 489.9
  Top Layer w0.2: 93.218,52.481 U2.12@94.869,52.481 ; U2.63@97.334,59.979 97.334,61.266 98.044,61.976 98.552,61.976
  Top Layer w0.254: C8.2@96.917,45.593 96.917,46.752 97.334,47.169 U2.18@97.334,48.479 ; 98.552,61.976 98.713,62.137 98.713,63.042 C9.2@98.79,63.119 ; v1(111.363,56.153) C13.2@111.363,57.404
  Top Layer w0.3: C15.2@91.218,60.976 C15.2@91.313,61.071 ; C12.2@91.313,53.324 91.424,53.213 92.456,53.213 93.195,52.474 93.218,52.474 ; J7.3@105.537,33.655 J7.3@105.664,33.782
  Top Layer w0.5: v1(36.322,48.006) D8.2@36.322,49.784 ; v1(45.085,79.502) 45.096,79.491 47.36,79.491 R17.2@47.371,79.48 ; R17.2@47.393,79.48 R16.2@49.276,79.48 v1(49.276,78.359) ; v1(53.975,74.168) 71.882,74.168 v1(74.93,71.12) ; v1(54.102,78.359) 54.121,78.378 54.698,78.378 54.991,78.671 R18.2@54.991,79.375 ; R18.2@55.002,79.491 R19.2@56.896,79.491 ; v1(61.341,32.639) v1(62.103,32.639) 66.421,32.639 67.183,33.401 67.183,34.512 C31.2@67.151,34.544 67.151,36.711 70.604,36.711 70.612,36.703 70.62,36.711 72.636,36.711 v1(72.644,36.703) ; v1(61.341,59.605) 62.907,59.605 64.283,60.981 64.283,62.656 D3.1@64.365,62.738 ; U4.4@65.343,65.532 64.658,65.532 64.365,65.239 D3.1@64.365,62.738 ; D4.1@70.231,62.738 D3.1@64.365,62.738 ; D4.1@70.255,62.738 70.255,60.428 71.739,58.944 77.486,58.944 C43.1@77.597,59.055 ; v1(74.93,67.691) 74.938,67.699 76.954,67.699 C2.2@76.962,67.707 ; C2.2@77.216,67.691 77.343,67.818 77.978,67.818 78.486,67.31 79.803,67.31 C1.2@79.883,67.23 80.09,67.437 85.09,67.437 87.63,69.977 U1.1@87.63,72.644 ; C43.1@77.549,58.992 C43.1@77.597,58.944 77.647,58.944 78.668,57.923 78.668,57.885 79.022,57.531 X1.2@80.772,57.531 ; X1.2@80.772,57.538 82.176,57.538 82.931,58.293 82.931,61.722 83.947,62.738 X1.4@85.572,62.738 87.376,62.738 88.011,62.103 88.011,61.325 C44.2@88.265,61.071 90.789,61.071 C15.2@90.805,61.087 ; v1(85.598,76.369) 85.598,75.255 86.487,74.366 86.487,73.279 86.995,72.771 87.503,72.771 U1.1@87.63,72.644 ; C21.2@85.979,33.544 85.979,32.674 86.272,32.381 92.583,32.381 J5.3@93.73,33.528 ; C11.2@88.392,53.801 v1(88.392,54.831) ; C11.2@88.692,53.674 88.392,53.674 88.439,53.721 89.662,53.721 90.17,53.213 C12.2@91.186,53.213 ; C15.2@91.313,61.071 92.726,61.071 93.091,60.706 v1@93.091,59.182 ; C4.2@93.599,70.485 92.329,70.485 91.948,70.866 90.725,70.866 C3.2@90.678,70.819 90.678,72.009 90,72.687 87.714,72.687 87.63,72.771 U1.1@87.63,72.644 ; C4.2@93.599,70.596 101.489,70.596 102.108,69.977 J3.2@102.108,68.199 ; C8.2@96.917,45.593 96.917,41.259 97.409,40.767 C5.2@98.679,40.767 ; v1@98.679,39.878 C5.2@98.679,40.767 ; C5.2@98.679,40.814 C5.2@98.679,40.767 ; C5.2@98.716,40.804 98.925,41.013 99.941,41.013 102.743,43.815 103.759,43.815 C14.2@103.814,43.76 ; C9.2@98.79,63.119 99.949,63.119 v1(101.219,64.389) ; R25.2@99.06,79.48 100.816,79.48 R24.2@100.838,79.502 ; v1(100.965,78.359) R24.2@100.965,79.48 ; C14.2@103.886,43.831 105.14,43.831 108.585,40.386 108.585,34.798 110.2,33.183 SW1.4@111.923,33.183 ; v1(106.68,78.232) R26.2@106.68,79.375 ; R26.2@106.68,79.491 R27.2@108.574,79.491 ; v1(108.585,78.232) R27.2@108.585,79.491 ; v1(109.601,48.514) 108.331,47.244 C6.2@108.331,45.593 108.331,44.069 110.49,41.91 113.792,41.91 115.951,39.751 C10.2@117.602,39.751 ; C13.2@111.379,57.531 111.427,57.579 111.427,59.88 C7.2@111.49,59.944 ; SW1.4@111.976,33.183 119.852,33.183 119.888,33.147 119.888,35.052 117.618,37.322 C10.2@117.618,39.751 ; J6.2@115.824,59.309 116.84,59.309 117.348,59.817 C20.2@118.745,59.817 ; C10.2@117.602,40.005 117.602,42.291 118.745,43.434 C20.2@118.745,59.817 ; C20.2@118.999,59.817 C20.2@118.745,59.817 ; C20.2@118.999,59.833 120.793,59.833 124.206,63.246 HD3.3@124.206,67.31
  Top Layer w2: v1(93.599,39.751) 93.726,39.624 J5.3@93.726,33.655
  Top Layer w3: 61.479,111.495 v1(62.611,110.363) ; 61.492,110.363 61.492,107.291 63.754,105.029 73.554,105.029 75.311,103.272 75.311,88.646 ; 99.06,108.966 102.078,105.948 v1@102.078,92.976
  Bottom Layer w0.5: D1.1@61.619,59.563 U3.7@64.967,59.563 66.802,59.563 67.818,60.579 71.882,60.579 73.279,59.182 C33.2@73.279,57.531 ; C34.2@71.485,46.355 71.485,47.586 71.778,47.879 76.161,47.879 76.454,48.172 76.454,50.014 D2.1@76.303,50.165 ; C34.2@71.501,46.355 71.565,46.291 71.565,45.148 74.041,42.672 v1(74.041,40.132) ; v1(72.644,36.703) 72.644,36.73 72.771,36.857 v1(72.771,40.132) ; C33.2@73.279,57.388 75.073,57.388 76.454,56.007 76.454,50.673 76.2,50.419 76.454,50.165 78.74,50.165 80.391,48.514 J1.3@80.391,47.244 J2.3@80.391,44.45 Q2.2@80.391,42.037 ; v1@74.93,67.818 v1(74.93,71.12) ; HD5.2@85.535,79.121 85.535,76.459 85.598,76.396 v1(85.598,76.369) ; v1(88.392,54.831) 89.06,55.499 92.202,55.499 93.091,56.388 v1(93.091,59.055) ; v1(100.965,78.359) 100.984,78.378 101.987,78.378 102.537,78.928 105.195,78.928 105.872,78.251 106.661,78.251 v1(106.68,78.232) ; v1(101.219,64.389) 102.108,65.278 J3.2@102.108,68.199 ; J7.3@105.402,33.79 J7.3@105.537,33.655 ; v1(108.585,78.232) 113.488,78.232 113.615,78.105 118.491,78.105 122.555,82.169 U11.1@122.555,87.268 ; v1(109.601,48.514) 109.601,48.541 109.728,48.668 109.728,54.518 111.344,56.134 v1@111.379,56.134
  Bottom Layer w2: v1@94.107,39.878 v1(98.66,39.878) 104.109,39.878 105.537,38.45 C22.2@105.537,36.322 ; C22.2@105.41,36.195 105.537,36.068 J7.3@105.537,33.655
  Bottom Layer w2.5: 58.039,33.528 82.042,33.528 88.138,39.624 v1@92.837,39.624
  other v1: 92.964,39.116 93.599,39.116 94.234,39.116 92.964,39.751 94.234,39.751 92.964,40.386 93.599,40.386 94.234,40.386 31.496,61.341 33.401,61.341 35.433,61.341 37.592,61.341 31.496,62.357 33.401,62.357 35.433,62.357 37.592,62.357 31.496,63.373 33.401,63.373 35.433,63.373 37.592,63.373 71.89,86.333 72.652,86.333 71.89,87.095 72.652,87.095 71.89,87.857 72.652,87.857 71.89,88.619 72.652,88.619 47.506,90.143 48.268,90.143 49.03,90.143 47.506,90.905 48.268,90.905 49.03,90.905 47.506,91.667 48.268,91.667 49.03,91.667 101.346,91.948 102.108,91.948 102.87,91.948 101.346,92.71 102.108,92.71 102.87,92.71 101.346,93.472 102.108,93.472 102.87,93.472 45.72,108.839 46.609,108.839 47.498,108.839 60.325,108.839 61.087,108.839 61.849,108.839 62.611,108.839 96.393,108.966 97.155,108.966 97.917,108.966 98.679,108.966 112.014,109.347 112.903,109.347 113.792,109.347 45.72,109.474 46.609,109.474 47.498,109.474 60.325,109.601 61.087,109.601 61.849,109.601 62.611,109.601 96.393,109.728 97.155,109.728 97.917,109.728 98.679,109.728 60.325,110.363 61.087,110.363 61.849,110.363 96.393,110.49 97.155,110.49 97.917,110.49 98.679,110.49
NetBS1_2: BS1.2 Q2.1 | length 2.8
  Bottom Layer w0.3: BS1.2@82.931,38.1 82.963,38.132 Q2.1@82.963,40.894
NetC3_1: C3.1 C4.1 U1.4 W1.1 | length 25
  Top Layer w0.5: W1.1@81.534,53.721 v1(81.534,55.372) ; v1(85.344,64.77) U1.4@85.344,65.997 89.365,65.997 90.678,67.31 C3.1@90.678,68.119 91.995,68.119 92.456,68.58 93.202,68.58 C4.1@93.218,68.596
  Bottom Layer w0.5: v1(81.534,55.372) 81.534,63.9 82.404,64.77 v1(85.344,64.77)
NetC10_1: C10.1 SW1.2 | length 2.2
  Top Layer w0.2: C10.1@119.618,39.751 119.618,38.751 119.888,38.481 119.888,37.721 SW1.2@119.926,37.683
NetC13_1: C13.1 U2.47 | length 3.1
  Top Layer w0.2: U2.47@106.334,57.479 109.288,57.479 C13.1@109.363,57.404 ; C13.1@109.474,58.023 C13.1@109.524,58.023
NetC14_1: C14.1 U2.31 | length 2.7
  Top Layer w0.2: C14.1@103.834,45.831 U2.31@103.834,48.479 ; C14.1@103.836,45.831 C14.1@103.886,45.831